# Altium PCB Controller.PcbDoc
Units mm, origin at the board's own origin, x right, y up, seen from the top; angles counter-clockwise.
Board outline 97.7 x 96.54 mm, 2 copper layers (Top Layer, Bottom Layer); 28 components, 28 nets, 153 pads, 22 vias.
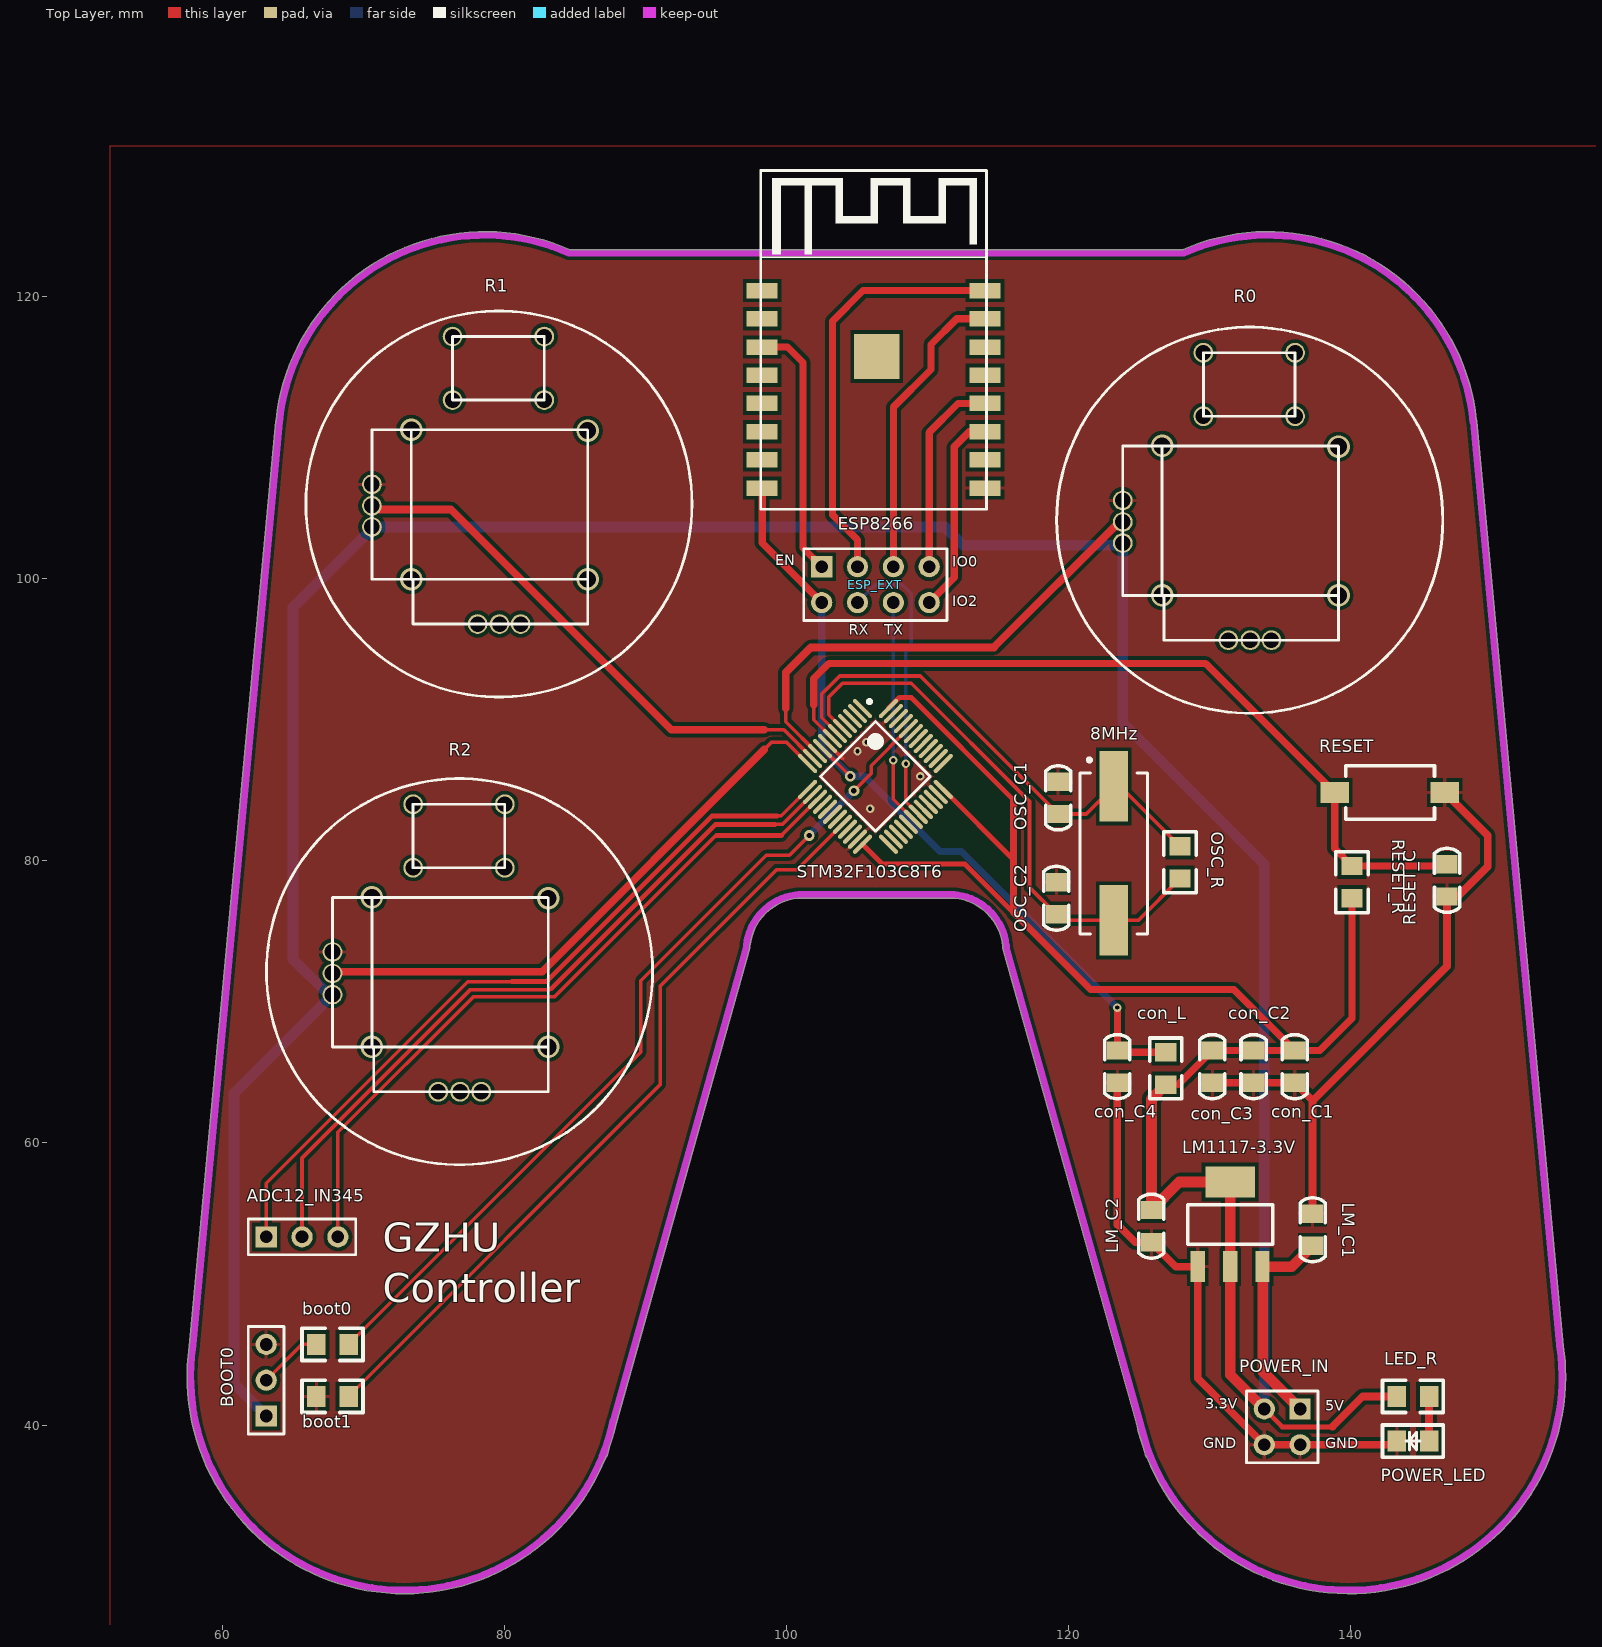
[diagram p0: Top Layer view]
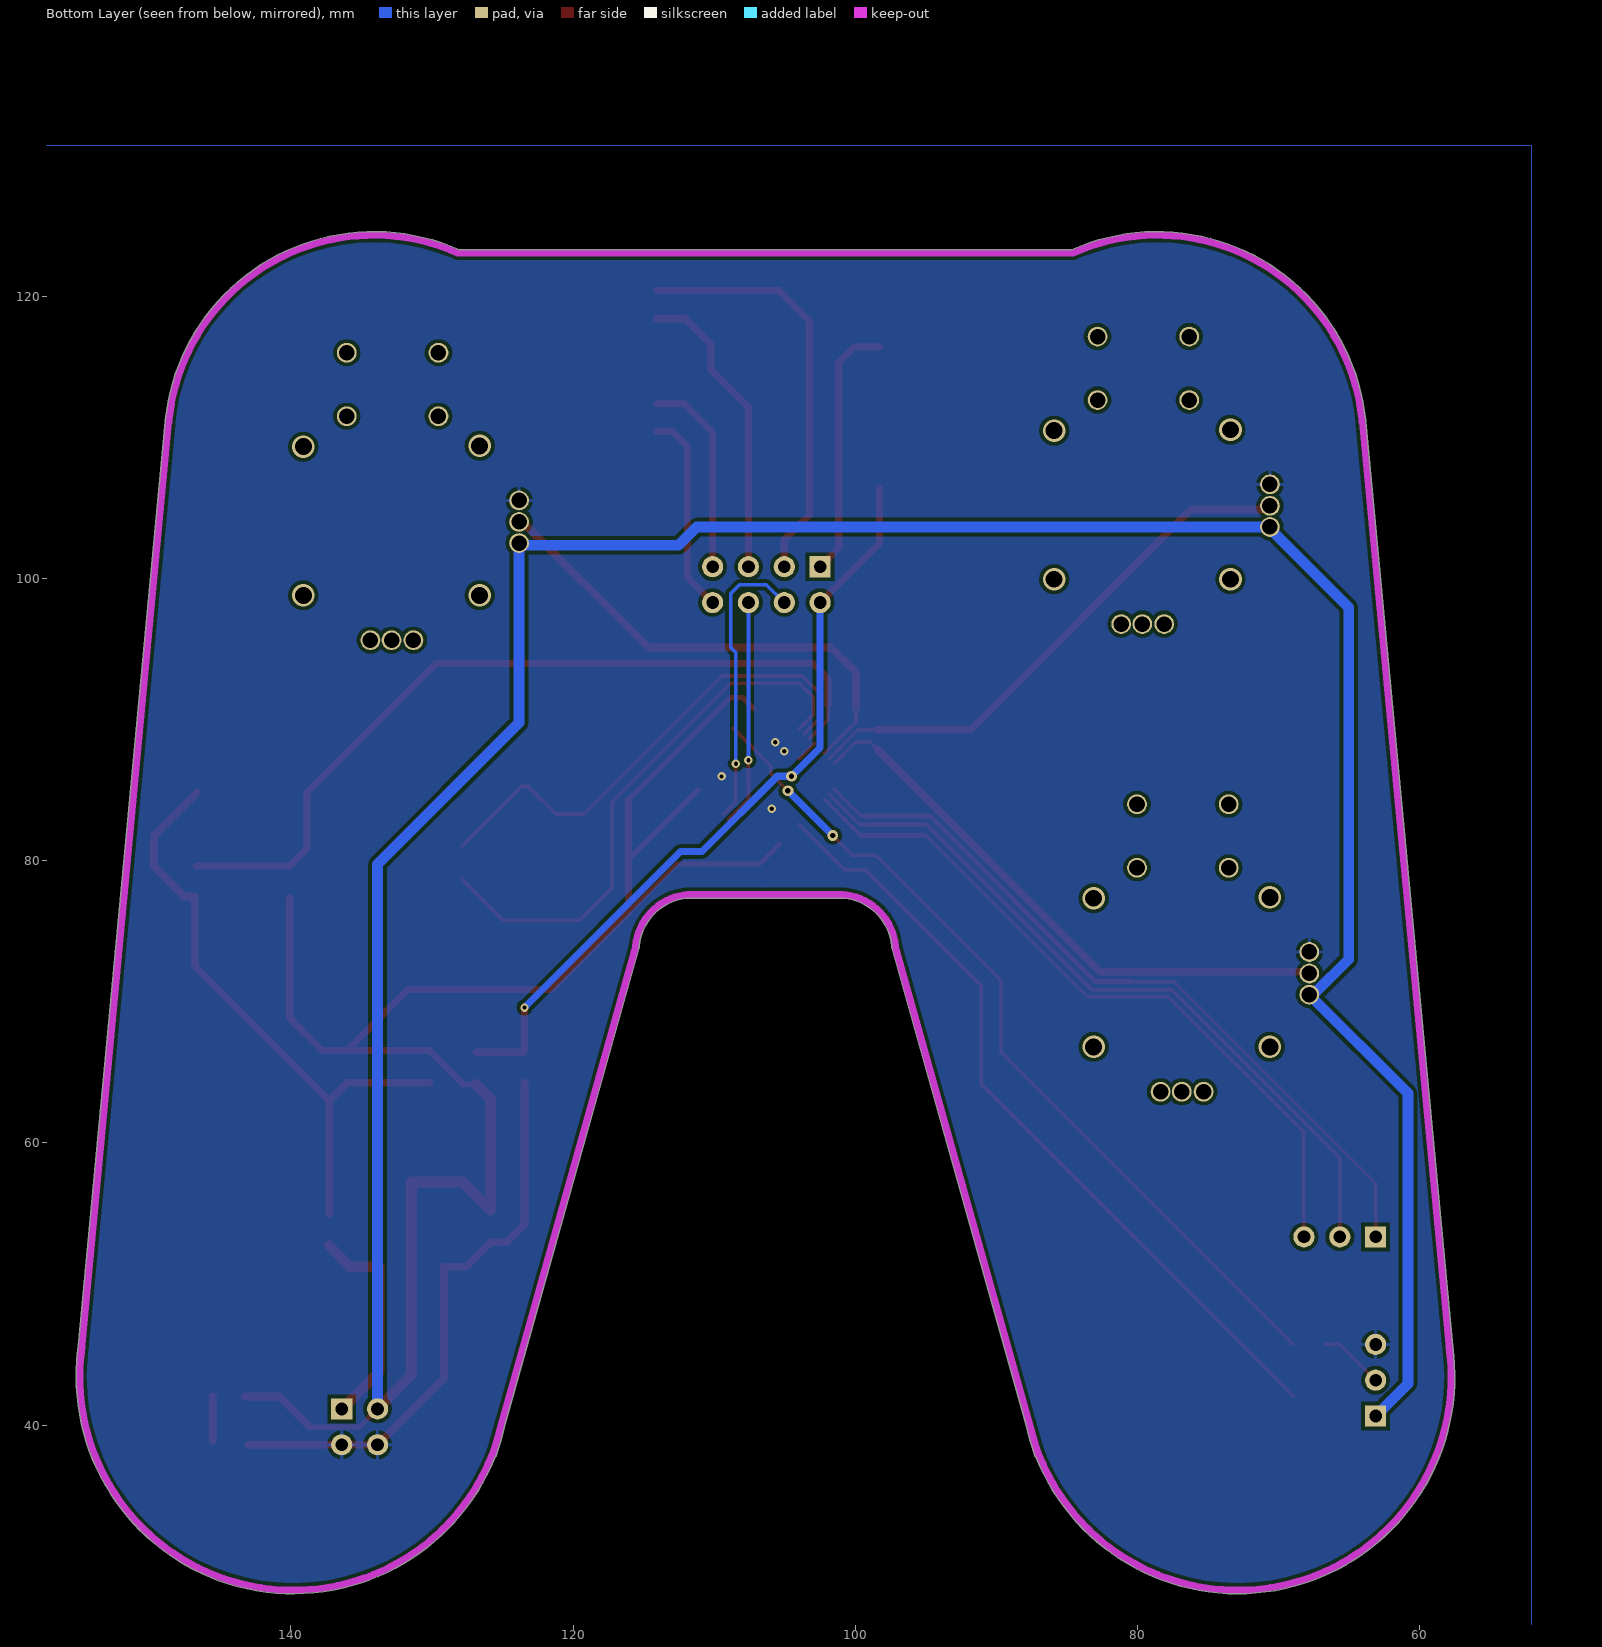
[diagram p1: Bottom Layer view, seen from below]
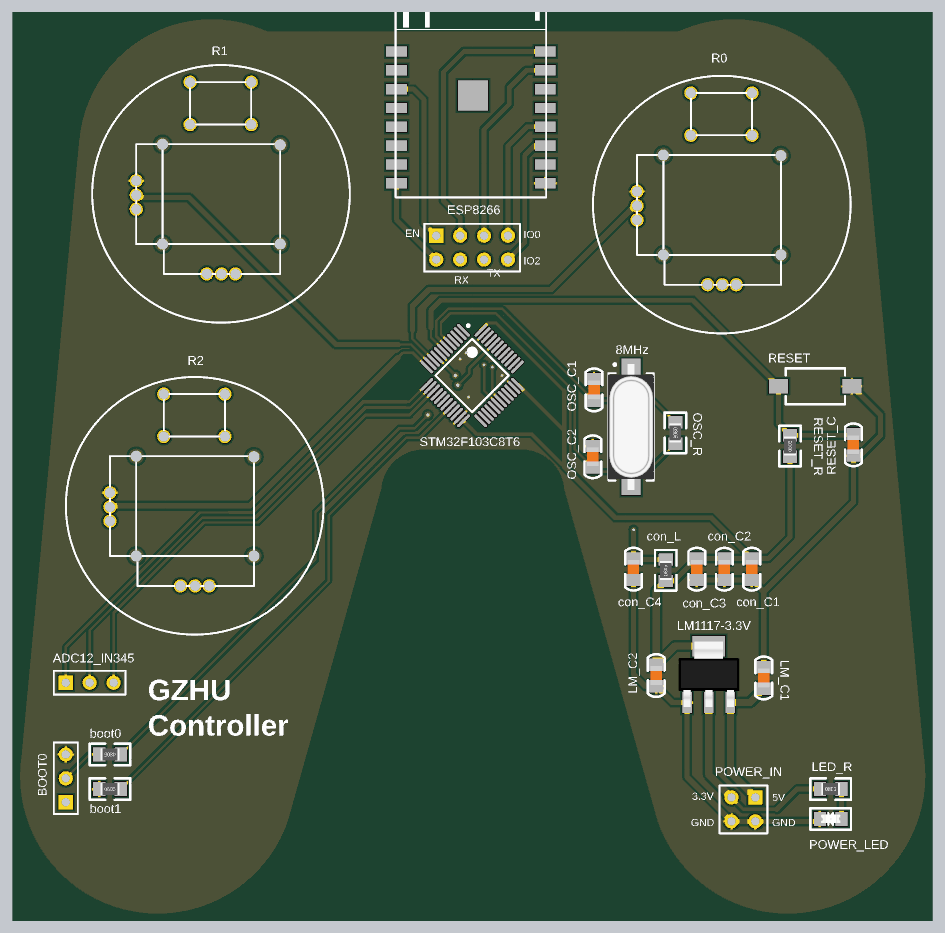
[diagram p2: 3D render of the assembled board from above, using the file's embedded part models]

## Layer stack, top to bottom
Top Solder: solder mask 0.0102, Solder Resist, Dk 3.5
Top Layer: signal copper 0.0356
Dielectric 1: dielectric 0.32, FR-4, Dk 4.8
Bottom Layer: signal copper 0.0356
Bottom Solder: solder mask 0.0102, Solder Resist, Dk 3.5

## Board outline
87.181,37.713 ccw(c87.045,37.923) 87.286,37.855 87.447,38.427 ccw(c72.898,43.434) 87.923,40.121 97.396,73.791 ccw(c97.155,73.859) 97.405,73.859 ccw(c97.155,73.859) 97.397,73.922 ccw(c97.155,73.986) 97.404,73.96 cw(c101.183,73.569) 100.803,77.349 ccw(c100.838,77.597) 100.838,77.347 106.299,77.347 ccw(c106.299,77.597) 106.362,77.355 ccw(c106.426,77.597) 106.426,77.347 111.887,77.347 ccw(c111.887,77.597) 111.922,77.349 cw(c111.542,73.569) 115.321,73.96 ccw(c115.57,73.986) 115.328,73.922 ccw(c115.57,73.859) 115.329,73.791 124.802,40.121 ccw(c139.827,43.434) 125.278,38.427 125.439,37.855 ccw(c125.68,37.923) 125.544,37.713 ccw(c139.827,43.434) 155.213,43.434 ccw(c139.827,43.434) 155.062,45.586 148.923,111.144 ccw(c148.674,111.121) 148.896,111.237 ccw(c134.112,109.728) 128.09,123.313 106.426,123.313 ccw(c106.426,123.063) 106.362,123.305 ccw(c106.299,123.063) 106.299,123.313 84.635,123.313 ccw(c78.613,109.728) 63.829,111.237 ccw(c64.051,111.121) 63.802,111.144 57.663,45.586 ccw(c72.898,43.434)

## Design rules (kind name [scope] priority, off if disabled: settings)
Clearance [All] p1: gap=0.254 ignorepadtopadclearanceinfootprint=FALSE except(0: Arc-Hole Track-Hole SMDPad-Hole THPad-Hole Via-Hole Fill-Hole Poly-Hole Region-Hole Text-Hole)
PolygonConnect [All] p1: connectstyle=Relief reliefconductorwidth=0.254 reliefentries=4 polygonreliefangle="90 Angle" airgapwidth=0.254
RoutingVias [All] p1: holewidth=0.711 width=1.27 viastyle="Through Hole" minholewidth=0.711 minwidth=1.27 maxholewidth=0.711 maxwidth=1.27
SolderMaskExpansion [All] p1: expansion=0.102
Width [All] p1: maxlimit=1 minlimit=0.254 preferedwidth=0.254
30 further rules are at their usual default settings.

## Components (designator, comment, footprint, x,y, rotation, side; value= is the part's Value field where it differs from the comment)
8MHz "8M" XTAL-C-SMD 123.19,80.518 r270 top
ADC12_IN345 "Header 3" HDR1X3 63.119,53.34 r0 top
boot0 "Res2" 0805-R-SMD 67.818,45.72 r180 top value=1K
BOOT0 "Header 3" HDR1X3 63.119,40.64 r90 top
boot1 "Res2" 0805-R-SMD 67.818,42.037 r0 top value=1K
con_C1 "Cap" 0805-C-SMD 136.017,65.405 r90 top value=104
con_C2 "Cap" 0805-C-SMD 133.096,65.405 r90 top value=104
con_C3 "Cap" 0805-C-SMD 130.175,65.405 r90 top value=104
con_C4 "Cap" 0805-C-SMD 123.444,65.405 r90 top value=104
con_L "Inductor" 0805-R-SMD 126.873,65.278 r90 top value=4.7uh
ESP8266 "ESP-12S Module" "ESP-12S Module" 106.172,113.411 r0 top
ESP_EXT "Header 4X2" HDR2X4 102.489,100.838 r0 top
LED_R "Res2" 0805-R-SMD 144.399,42.037 r0 top value=1K
LM1117-3.3V "LM1117-3.3V" SOT-223 131.445,54.229 r270 top
LM_C1 "Cap" 0805-C-SMD 137.287,53.848 r270 top value=104
LM_C2 "Cap" 0805-C-SMD 125.857,54.102 r90 top value=104
OSC_C1 "Cap" 0805-C-SMD 119.253,84.455 r90 top value=10pF
OSC_C2 "Cap" 0805-C-SMD 119.126,77.343 r90 top value=10pF
OSC_R "Res2" 0805-R-SMD 127.889,79.883 r270 top value=1M
POWER_IN "Header 2X2" HDR2X2 136.398,41.148 r180 top
POWER_LED "LED0" LED-0805 144.399,38.862 r180 top
R0 "RPot" 摇杆电位器 120.142,105.029 r0 top value=1K
R1 "RPot" 摇杆电位器 66.929,106.172 r0 top value=1K
R2 "RPot" 摇杆电位器 64.135,73.025 r0 top value=1K
RESET "RESET" 贴片按键 142.748,84.836 r180 top
RESET_C "Cap" 0805-C-SMD 146.812,78.613 r90 top value=104
RESET_R "Res2" 0805-R-SMD 140.081,78.486 r90 top value=10K
STM32F103C8T6 "STM32F103C8T6" LQFP48_N 106.299,85.979 r315 top (schematic designator MCU)

## Footprints (in the part's own frame and the unit in brackets; to place one, negate y for a bottom-side part, rotate by r counter-clockwise, add the part's x,y. Pads: shape width x height; smd on the part's side, far side on the other; paste and mask are expansions set on the pad)
0805-C-SMD [mm]
  rect 1.3x1.5 smd: 1(-1.143,0) 2(1.143,0)
  silkscreen extent -2.27,-0.89 2.27,0.89, body extent -1,-0.62 1,0.63
0805-R-SMD [mm]
  rect 1.3x1.5 smd: 1(-1.143,0) 2(1.143,0)
  silkscreen extent -2.16,-1.14 2.16,1.14, body extent -1,-0.63 1,0.63, height 0.55
"ESP-12S Module" [mm]
  rect 2.2x1.1 smd: 1(-7.9,7) 2(-7.9,5) 3(-7.9,3) 4(-7.9,1) 5(-7.9,-1) 6(-7.9,-3) 7(-7.9,-5) 8(-7.9,-7) 9(7.9,-7) 10(7.9,-5) 11(7.9,-3) 12(7.9,-1) 13(7.9,1) 14(7.9,3) 15(7.9,5) 16(7.9,7)
  rect 3.2x3.2 smd: 17(0.22,2.321)
  silkscreen extent -8,-8.5 8,15.5
HDR1X3 [mm] "Connector; Header; 3 Position"
  rect 1.5x1.5 hole 0.9: 1(0,0)
  round 1.5 hole 0.9: 2(2.54,0) 3(5.08,0)
  silkscreen extent -1.27,-1.27 6.35,1.27
HDR2X2 [mm] "Connector; Header; 2x2 Position"
  rect 1.5x1.5 hole 0.9: 1(0,0)
  round 1.5 hole 0.9: 2(0,2.54) 3(2.54,0) 4(2.54,2.54)
  silkscreen extent -1.27,-1.27 3.81,3.81
HDR2X4 [mm] "Connector; Header; 4x2 Position"
  rect 1.5x1.5 hole 0.9: 1(0,0)
  round 1.5 hole 0.9: 2(0,-2.54) 3(2.54,0) 4(2.54,-2.54) 5(5.08,0) 6(5.08,-2.54) 7(7.62,0) 8(7.62,-2.54)
  silkscreen extent -1.27,-3.81 8.89,1.27
LED-0805 [mm]
  rect 1.3x1.5 smd: 1(-1.143,0) 2(1.143,0)
  silkscreen extent -2.16,-1.14 2.16,1.14, body extent -1.04,-0.45 1.02,0.45, height 0.85
LQFP48_N [mm] "Thin QFP, 48-Leads, Body 7x7mm, Pitch 0.5mm, IPC Medium Density"
  oval 1.8x0.3 smd: 1(-4.05,2.75) 2(-4.05,2.25) 3(-4.05,1.75) 4(-4.05,1.25) 5(-4.05,0.75) 6(-4.05,0.25) 7(-4.05,-0.25) 8(-4.05,-0.75) 9(-4.05,-1.25) 10(-4.05,-1.75) 11(-4.05,-2.25) 12(-4.05,-2.75) 25(4.05,-2.75) 26(4.05,-2.25) 27(4.05,-1.75) 28(4.05,-1.25) 29(4.05,-0.75) 30(4.05,-0.25) 31(4.05,0.25) 32(4.05,0.75) 33(4.05,1.25) 34(4.05,1.75) 35(4.05,2.25) 36(4.05,2.75)
  oval 0.3x1.8 smd: 13(-2.75,-4.05) 14(-2.25,-4.05) 15(-1.75,-4.05) 16(-1.25,-4.05) 17(-0.75,-4.05) 18(-0.25,-4.05) 19(0.25,-4.05) 20(0.75,-4.05) 21(1.25,-4.05) 22(1.75,-4.05) 23(2.25,-4.05) 24(2.75,-4.05) 37(2.75,4.05) 38(2.25,4.05) 39(1.75,4.05) 40(1.25,4.05) 41(0.75,4.05) 42(0.25,4.05) 43(-0.25,4.05) 44(-0.75,4.05) 45(-1.25,4.05) 46(-1.75,4.05) 47(-2.25,4.05) 48(-2.75,4.05)
  silkscreen extent -4.17,-2.75 2.75,3.57, body extent -3.5,-3.5 3.5,3.5, height 1.6
SOT-223 [mm]
  rect 2.2x1 smd: 1(3,-2.3) 2(3,0) 3(3,2.3)
  rect 2.2x3.5 smd: 2(-3,0)
  silkscreen extent -1.4,-3 1.4,3, body extent -3.49,-3.24 3.49,3.24, height 1.64
XTAL-C-SMD [mm]
  rect 5x2 smd: 1(-4.75,0) 2(4.75,0)
  silkscreen extent -6.75,-2.4 5.7,2.4, body extent -6.7,-2.46 6.7,2.44, height 4
摇杆电位器 [mm]
  round 1.4 hole 1.1: 1(3.683,0.508) 2(3.683,-1.016) 3(3.683,-2.516) 4(11.176,-9.398) 5(12.727,-9.398) 6(14.224,-9.398) 7(9.398,6.477) 8(15.898,6.477) 9(15.898,10.977) 10(9.398,10.977)
  silkscreen extent -1,-14.57 26.37,12.79
贴片按键 [mm]
  rect 2x1.5 smd: 1(-3.9,0) 2(3.9,0)
  silkscreen extent -3.17,-1.9 3.13,1.9, body extent -3.96,-1.94 3.93,1.91, height 2.5

## Part data
8MHz: library part XTAL, "Crystal Oscillator", LatestRevisionDate=17-Jul-2002, LatestRevisionNote="Re-released for DXP Platform.", PackageDescription="Crystal, Thru-Hole; 2 Leads; Body 3.1 x 8.2 mm (Dia.xH)", PackageReference=R38, Published=8-Jun-2000, Publisher="Altium Limited"
ADC12_IN345 BOOT0: "Header, 3-Pin", LatestRevisionDate=17-Jul-2002, LatestRevisionNote="Re-released for DXP Platform.", Publisher="Altium Limited"
boot0 boot1 LED_R OSC_R RESET_R: "Resistor", LatestRevisionDate=17-Jul-2002, LatestRevisionNote="Re-released for DXP Platform.", PackageDescription="Axial Device, Thru-Hole; 2 Leads; 0.4 in Pin Spacing", PackageReference=AXIAL-0.4, Published=8-Jun-2000, Publisher="Altium Limited"
con_C1 con_C2 con_C3 con_C4 LM_C1 LM_C2 OSC_C1 OSC_C2 RESET_C: "Capacitor", LatestRevisionDate=17-Jul-2002, LatestRevisionNote="Re-released for DXP Platform.", PackageDescription="Radial Cap, Thru-Hole; 2 Leads; 0.3 in Pin Spacing", PackageReference=RAD-0.3, Published=8-Jun-2000, Publisher="Altium Limited"
ESP_EXT: "Header, 4-Pin, Dual row", LatestRevisionDate=17-Jul-2002, LatestRevisionNote="Re-released for DXP Platform.", Publisher="Altium Limited"
LM1117-3.3V: library part LM1117
POWER_IN: "Header, 2-Pin, Dual row", LatestRevisionDate=17-Jul-2002, LatestRevisionNote="Re-released for DXP Platform.", Publisher="Altium Limited"
POWER_LED: "Typical INFRARED GaAs LED", LatestRevisionDate=08-Jul-2005, LatestRevisionNote="Mech Layer 1 removed.", PackageDescription="LED; 2 Leads", PackageReference=LED-0, Published=8-Jun-2000, Publisher="Altium Limited"
R0 R1 R2: "Potentiometer", LatestRevisionDate=17-Jul-2002, LatestRevisionNote="Re-released for DXP Platform.", PackageDescription="Variable Resistor, Thru-Hole; 3 Leads", PackageReference=VR5, Published=8-Jun-2000, Publisher="Altium Limited", Set Position=0.5, Sim Note="Enter the Resistance value and the set point into parameter fields."
RESET: library part SW-PB, "Switch", LatestRevisionDate=17-Jul-2002, LatestRevisionNote="Re-released for DXP Platform.", PackageDescription="Switch; 2 Leads", PackageReference=SPST-2, Published=24-Mar-1999, Publisher="Altium Limited"
STM32F103C8T6: "STM32 ARM-based 32-bit MCU with 64 Kbytes Flash, 48-pin LQFP, Industrial Temperature", ComponentLink1Description="Manufacturer Link", ComponentLink1URL=www.st.com/stm32, ComponentLink2Description=Datasheet, ComponentLink2URL=http://www.st.com/stonline/products/literature/ds/13587.pdf, DatasheetVersion="rev6, Mar-2008", PackageDescription="48-Pin Low-Profile Quad Flat Pack, 7 x 7 mm Body, 0.5 mm Pitch (LQFP48)", PackageReference=LQFP48, PackageVersion=Mar-2008, Published=30-May-2008, Publisher="Altium Limited"
con_L: Code_IEC=1005, Code_JEITA=0402, LatestRevisionDate=29-May-2009, LatestRevisionNote="IPC-7351 Footprint Added.", PackageDescription="Chip Inductor", PackageReference=0402-A, Published=8-Jun-2000, Publisher="Altium Limited"

## Via types
v1: diameter 1.6, hole 1.2, Top Layer to Bottom Layer, 12 vias
v2: diameter 0.6, hole 0.3, Top Layer to Bottom Layer, 7 vias
v3: diameter 0.762, hole 0.381, Top Layer to Bottom Layer, 3 vias

## Nets (pads, with @x,y where several pads share a name; then routed paths per layer and width w, separated by ;. In a path a pad name is that pad's centre, name@x,y a point inside that pad or via, vN(x,y) a via of type N, cw(c..) or ccw(c..) an arc to the next point about the centre after c; other vN are vias at no path point)
+3.3V: BOOT0.1 con_C1.2 con_C2.2 con_C3.2 con_L.1 LED_R.1 LM1117-3.3V.2 LM_C2.2 POWER_IN.3 R0.3 R1.3 R2.3 RESET_R.1 STM32F103C8T6.24 STM32F103C8T6.36 STM32F103C8T6.48 | length 321
  Top Layer w0.354: R2.3@67.461,70.509 R2.3 ; STM32F103C8T6.24 106.794,79.756 112.649,79.756 116.078,76.327 ; STM32F103C8T6.48 107.998,91.567 108.839,91.567 116.078,84.328 ; STM32F103C8T6.36 116.078,80.089 ; con_L.1 127.762,64.135 ; POWER_IN.3 135.128,39.878 138.684,39.878
  Top Layer w0.508: 116.078,84.328 116.078,80.089 116.078,76.327 121.539,70.866 131.699,70.866 con_C1.2 ; 127.762,64.135 con_C3.2 con_C2.2 con_C1.2 ; RESET_R.1 140.081,68.834 137.795,66.548 con_C1.2
  Top Layer w0.554: 138.684,39.878 140.843,42.037 LED_R.1
  Top Layer w0.762: con_L.1 125.857,63.119 LM_C2.2 127.841,57.229 131.445,57.229 131.445,51.229 131.445,43.561 POWER_IN.3
  Bottom Layer w0.762: BOOT0.1 60.833,42.926 60.833,63.524 R2.3 ; R2.3@67.818,70.636 67.413,70.636 65.024,73.025 65.024,97.941 R1.3@70.485,103.402 ; R1.3 111.228,103.656 112.522,102.362 123.674,102.362 R0.3 123.825,89.789 133.858,79.756 POWER_IN.3
+5V: LM1117-3.3V.3 LM_C1.2 POWER_IN.1 | length 15.3
  Top Layer w0.762: POWER_IN.1 133.745,43.801 LM1117-3.3V.3 135.811,51.229 LM_C1.2
ADC12_IN0: R0.2 STM32F103C8T6.10 | length 35
  Top Layer w0.254: 99.949,90.805 99.949,89.854 STM32F103C8T6.10
  Top Layer w0.554: 99.949,90.805 99.949,93.345 101.727,95.123 114.694,95.123 123.584,104.013 R0.2
ADC12_IN1: R1.2 STM32F103C8T6.11 | length 38.7
  Top Layer w0.254: 98.425,89.281 99.815,89.281 STM32F103C8T6.11
  Top Layer w0.554: R1.2@70.485,104.902 76.2,104.902 91.821,89.281 98.425,89.281
ADC12_IN2: R2.2 STM32F103C8T6.12 | length 41
  Top Layer w0.254: 98.425,87.884 98.933,88.392 99.997,88.392 STM32F103C8T6.12
  Top Layer w0.554: R2.2@67.818,72.136 82.677,72.136 98.425,87.884
ADC12_IN3: ADC12_IN345.1 STM32F103C8T6.13 | length 53.7
  Top Layer w0.254: ADC12_IN345.1 63.119,57.15 77.397,71.428 80.526,71.428 ; 99.314,83.185 99.616,83.185 STM32F103C8T6.13
  Top Layer w0.354: 80.526,71.428 82.97,71.428 94.727,83.185 99.314,83.185
ADC12_IN4: ADC12_IN345.2 STM32F103C8T6.14 | length 52.5
  Top Layer w0.254: ADC12_IN345.2 65.659,58.928 77.601,70.87 83.201,70.87 83.283,70.951 83.354,70.951 ; 99.187,82.577 99.715,82.577 STM32F103C8T6.14
  Top Layer w0.354: 83.354,70.951 94.979,82.577 99.187,82.577
ADC12_IN5: ADC12_IN345.3 STM32F103C8T6.15 | length 51.1
  Top Layer w0.254: ADC12_IN345.3 68.199,60.75 77.811,70.362 83.553,70.362 94.996,81.805 ; 99.633,81.788 STM32F103C8T6.15
  Top Layer w0.354: 95.05,81.788 99.633,81.788
BOOT0: boot0.1 STM32F103C8T6.44 | length 61.1
  Top Layer w0.254: boot0.1 89.662,66.421 89.662,71.501 98.552,80.391 100.203,80.391 v3(101.6,81.788) ; v3(104.775,84.963) 106,86.188 106,86.741 STM32F103C8T6.44
  Bottom Layer w0.508: v3(101.6,81.788) v3(104.775,84.963)
BOOT1: boot1.2 STM32F103C8T6.20 | length 55.9
  Top Layer w0.254: boot1.2 91.059,64.135 91.059,71.12 99.314,79.375 100.756,79.375 STM32F103C8T6.20
D3.3V: con_C4.2 con_L.2 ESP8266.8 ESP_EXT.2 STM32F103C8T6.9 | length 58
  Top Layer w0.254: STM32F103C8T6.9 v3(104.521,85.989)
  Top Layer w0.354: con_C4.2 con_C4.2@123.571,66.421
  Top Layer w0.508: ESP8266.8 98.272,102.515 ESP_EXT.2 ; con_C4.2 v2(123.444,69.596) ; con_C4.2@123.571,66.421 con_L.2
  Bottom Layer w0.508: ESP_EXT.2 102.489,88.021 v3(104.521,85.989) 105.527,85.989 110.871,80.645 112.395,80.645 v2(123.444,69.596)
ESP_EN: ESP8266.3 ESP_EXT.1 | length 18.4
  Top Layer w0.508: ESP8266.3 100.076,116.411 101.171,115.316 101.171,102.156 ESP_EXT.1
ESP_IO0: ESP8266.12 ESP_EXT.7 | length 14.3
  Top Layer w0.508: ESP_EXT.7 110.109,110.363 112.157,112.411 ESP8266.12
ESP_IO2: ESP8266.11 ESP_EXT.8 | length 14.4
  Top Layer w0.508: ESP_EXT.8 111.887,100.076 111.887,109.347 112.951,110.411 ESP8266.11
ESP_RXD: ESP8266.15 ESP_EXT.5 | length 21.4
  Top Layer w0.508: ESP_EXT.5 107.569,112.141 110.236,114.808 110.236,116.586 112.061,118.411 ESP8266.15
ESP_TXD: ESP8266.16 ESP_EXT.3 | length 29.9
  Top Layer w0.508: ESP_EXT.3 105.029,102.743 103.251,104.521 103.251,118.237 105.425,120.411 ESP8266.16
GND: BOOT0.3 boot1.1 con_C1.1 con_C2.1 con_C3.1 con_C4.1 ESP8266.9 LM1117-3.3V.1 LM_C1.1 LM_C2.1 OSC_C1.2 OSC_C2.2 POWER_IN.2 POWER_IN.4 POWER_LED.2 R0.1 R1.1 R2.1 RESET.1 RESET_C.1 STM32F103C8T6.8 STM32F103C8T6.23 STM32F103C8T6.35 STM32F103C8T6.47 | length 87.2
  Top Layer w0.254: STM32F103C8T6.8 103.968,87.249
  Top Layer w0.554: R1.1@70.395,106.68 R1.1 ; con_C4.1 123.444,54.229 124.714,52.959 LM_C2.1 127.587,51.229 LM1117-3.3V.1 129.145,43.321 POWER_IN.4 POWER_IN.2 POWER_LED.2@143.002,38.608 ; con_C3.1 con_C2.1 con_C1.1 137.287,62.992 ; LM_C1.1 137.287,62.992 ; RESET.1 149.696,81.788 149.696,79.592 147.574,77.47 RESET_C.1 146.812,72.517 137.287,62.992
  Bottom Layer w0.762: R2.1@67.818,73.66 R2.1@68.111,73.367
  other v2: 105.918,83.693 109.474,85.979 105.029,87.757 105.664,88.392
MOTOR1: STM32F103C8T6.16
MOTOR2: STM32F103C8T6.17
MOTOR3: STM32F103C8T6.18
MOTOR4: STM32F103C8T6.19
Net8MHz_1: 8MHz.1 OSC_C1.1 OSC_R.1 STM32F103C8T6.6 | length 35.8
  Top Layer w0.254: STM32F103C8T6.6 102.489,90.143 102.489,91.821 103.759,93.091 109.474,93.091 OSC_C1.1 121.234,83.312 8MHz.1 123.647,85.268 OSC_R.1
Net8MHz_2: 8MHz.2 OSC_C2.1 OSC_R.2 STM32F103C8T6.5 | length 39.7
  Top Layer w0.254: 102.997,90.342 STM32F103C8T6.5 ; 103.003,90.347 102.997,90.353 102.997,91.611 103.969,92.583 108.839,92.583 117.221,84.201 117.221,78.105 OSC_C2.1 119.558,75.768 8MHz.2 124.917,75.768 OSC_R.2
NetBOOT0_2: BOOT0.2 boot0.2 | length 4.6
  Top Layer w0.254: BOOT0.2 65.659,45.72 boot0.2
NetLED_R_2: LED_R.2 POWER_LED.1 | length 3.2
  Top Layer w0.554: POWER_LED.1 LED_R.2
NetMCU_7: RESET.2 RESET_C.2 RESET_R.2 STM32F103C8T6.7 | length 58.3
  Top Layer w0.254: 101.931,91.059 101.931,89.993 STM32F103C8T6.7
  Top Layer w0.508: 101.931,91.059 101.931,92.263 101.931,92.914 102.997,93.98 103.648,93.98 129.704,93.98 RESET.2 138.848,80.862 RESET_R.2 RESET_C.2@146.685,79.629
RX: ESP_EXT.4 STM32F103C8T6.31 | length 20.9
  Top Layer w0.254: v2(108.458,86.868) 108.458,84.174 STM32F103C8T6.31
  Bottom Layer w0.254: ESP_EXT.4 106.299,99.568 108.204,99.568 108.839,98.933 108.839,95.123 108.458,94.742 v2@108.458,86.741
TX: ESP_EXT.6 STM32F103C8T6.30 | length 15.9
  Top Layer w0.254: v2(107.569,87.122) 107.569,84.355 STM32F103C8T6.30
  Bottom Layer w0.254: v2(107.569,87.122) ESP_EXT.6
pads on no net: ESP8266.1 ESP8266.2 ESP8266.4 ESP8266.5 ESP8266.6 ESP8266.7 ESP8266.10 ESP8266.13 ESP8266.14 ESP8266.17 R0.4 R0.5 R0.6 R0.7 R0.8 R0.9 R0.10 R1.4 R1.5 R1.6 R1.7 R1.8 R1.9 R1.10 R2.4 R2.5 R2.6 R2.7 R2.8 R2.9 R2.10 STM32F103C8T6.1 STM32F103C8T6.2 STM32F103C8T6.3 STM32F103C8T6.4 STM32F103C8T6.21 STM32F103C8T6.22 STM32F103C8T6.25 STM32F103C8T6.26 STM32F103C8T6.27 STM32F103C8T6.28 STM32F103C8T6.29 STM32F103C8T6.32 STM32F103C8T6.33 STM32F103C8T6.34 STM32F103C8T6.37 STM32F103C8T6.38 STM32F103C8T6.39 STM32F103C8T6.40 STM32F103C8T6.41 STM32F103C8T6.42 STM32F103C8T6.43 STM32F103C8T6.45 STM32F103C8T6.46
copper on no net:
  other v1: 70.612,66.802 83.112,66.802 83.112,77.343 70.612,77.402 126.619,98.806 139.119,98.806 73.406,99.949 85.906,99.949 139.119,109.347 126.619,109.406 85.906,110.49 73.406,110.549

## Polygon pours and split planes (outlines as drawn)
GND on Bottom Layer "GND_L02_P010" (solid, remove dead copper, pour order 10): 47.498,136.779 49.276,135.001 167.513,135.001 167.513,39.497 182.626,24.384 34.036,24.384
no net on Bottom Layer "NONET_L02_P002" (solid, shelved, pour order 2): 52.07,130.683 165.354,130.683 165.481,130.556 165.481,23.876 52.07,23.876
no net on Top Layer "NONET_L01_P008" (solid, remove dead copper, pour order 8): 54.356,46.355
GND on Top Layer "GND_L01_P006" (solid, remove dead copper, pour order 6): 47.244,138.049 165.989,138.049 165.989,26.67 42.545,26.67 38.989,30.226
no net on Top Layer "NONET_L01_P004" (solid, remove dead copper, shelved, pour order 4): 52.07,130.683 165.481,130.683 165.481,23.876 52.07,23.876

## Keep-outs
Keep-Out Layer:
  lines w0.5: 57.892,45.339 64.051,111.121 ; 57.912,45.557 ccw(c72.898,43.434) 87.71,40.322 ; 64.066,111.08 cw(c78.613,109.728) 84.582,123.063 106.299,123.063 ; 87.045,37.923 97.155,73.859 ; 97.155,73.986 cw(c101.183,73.569) 101.6,77.597 ; 100.838,77.597 101.219,77.597 106.299,77.597 ; 106.426,77.597 111.506,77.597 111.887,77.597 ; 106.426,123.063 128.143,123.063 cw(c134.112,109.728) 148.659,111.08 ; 111.125,77.597 cw(c111.542,73.569) 115.57,73.986 ; 115.57,73.859 125.68,37.923 ; 125.015,40.322 ccw(c139.827,43.434) 154.813,45.557 ; 148.674,111.121 154.833,45.339

## Other copper
Top Layer:
  pour cut-out: 49.657,137.16

## Silkscreen, mask and mechanical layers (free items; w line width, h text height)
Top Overlay:
  text "TX" at 106.934,95.758 h1.27
  text "GZHU / Controller" at 71.374,48.006 h3.56

## Text inside footprints (layer, text, board x,y; h text height)
ESP_EXT: Top Overlay "RX" at 104.394,95.758 h1.27; Top Overlay "EN" at 99.187,100.711 h1.27; Top Overlay "IO0" at 111.76,100.584 h1.27; Top Overlay "IO2" at 111.76,97.79 h1.27
POWER_IN: Top Overlay "5V" at 138.176,40.767 h1.27; Top Overlay "GND" at 138.176,38.1 h1.27; Top Overlay "GND" at 129.54,38.1 h1.27; Top Overlay "3.3V" at 129.667,40.894 h1.27